# Altium PCB fpga.PcbDoc (part 2 of 6)
Units mm, origin at the board's own origin, x right, y up, seen from the top; angles counter-clockwise.
Board outline 111.63 x 111 mm, 2 copper layers (Top Layer, Bottom Layer); 5 components, 0 nets, 896 pads, 0 vias.
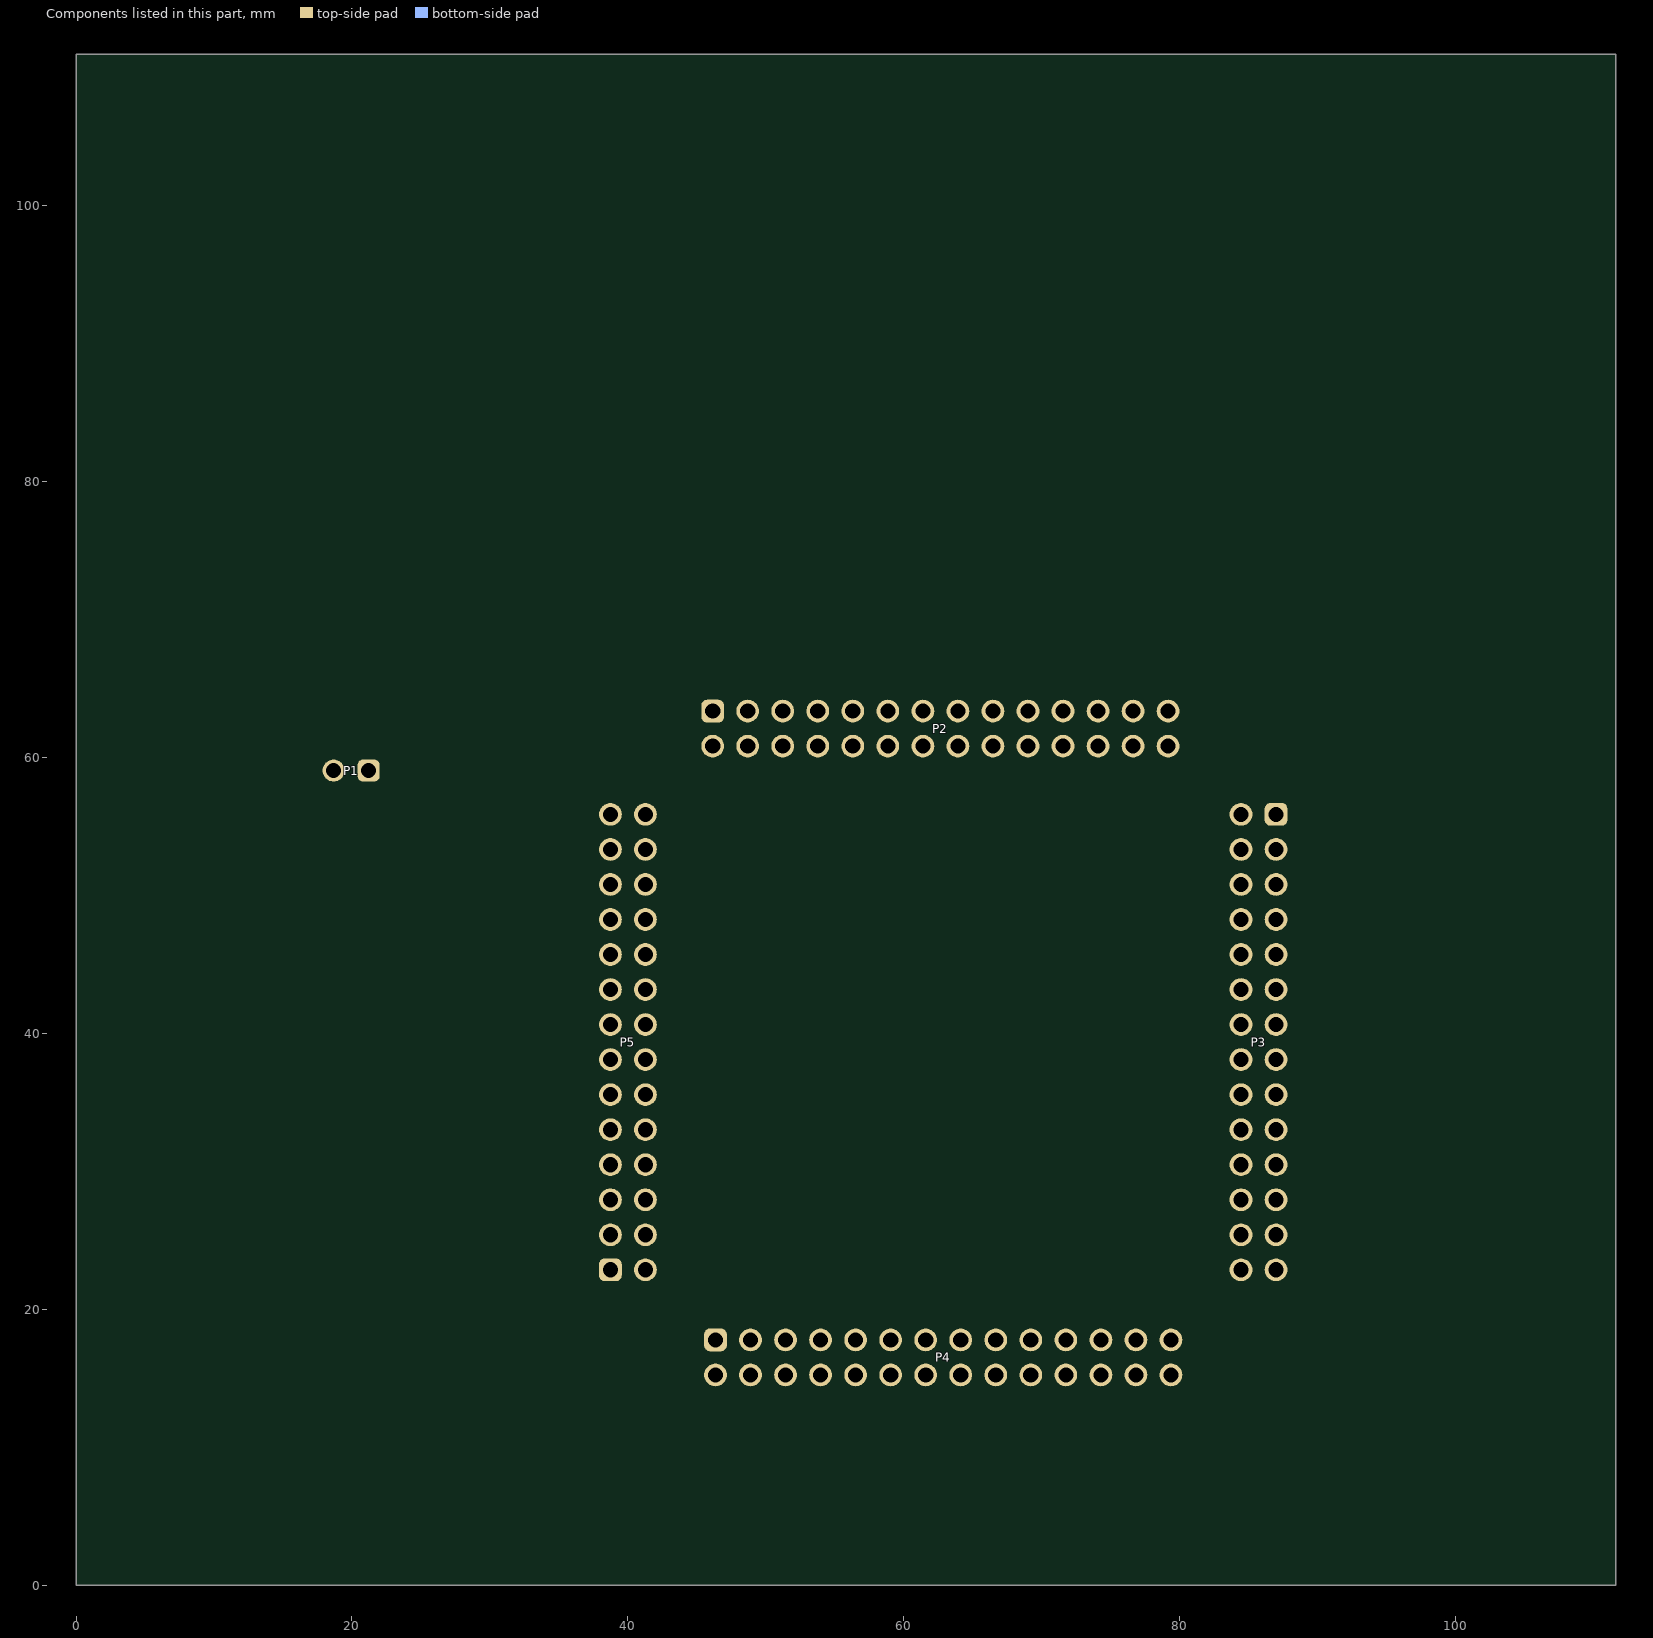
[diagram p2: the components of this part, seen from the top]

## Nets (pads, with @x,y where several pads share a name; then routed paths per layer and width w, separated by ;. In a path a pad name is that pad's centre, name@x,y a point inside that pad or via, vN(x,y) a via of type N, cw(c..) or ccw(c..) an arc to the next point about the centre after c; other vN are vias at no path point) (continued)
copper on no net: (continued)
  Top Layer w0.027: 2.847,21.27 2.872,21.245 2.872,21.07 2.997,21.07 3.022,21.045 ; 2.847,21.295 2.772,21.295 ; 2.847,21.345 2.772,21.345 ; 2.847,21.395 2.772,21.395 ; 2.847,21.445 2.772,21.445 ; 2.847,21.495 2.772,21.495 ; 2.847,21.545 2.772,21.545 ; 2.847,21.595 2.772,21.595 ; 2.847,21.645 2.772,21.645 ; 2.847,21.695 2.772,21.695 ; 2.847,21.745 2.772,21.745 ; 2.847,21.795 2.772,21.795 ; 2.847,21.845 2.772,21.845 ; 2.847,21.895 2.772,21.895 ; 2.847,21.945 2.772,21.945 ; 2.847,21.995 2.772,21.995 ; 2.847,22.045 2.772,22.045 ; 2.847,22.095 2.772,22.095 ; 2.847,22.145 2.772,22.145 ; 2.847,22.195 2.772,22.195 ; 2.847,22.245 2.772,22.245 ; 2.847,22.295 2.772,22.295 ; 2.847,22.345 2.772,22.345 ; 2.847,22.395 2.772,22.395 ; 2.847,22.445 2.772,22.445 ; 2.847,22.495 2.772,22.495 ; 2.847,22.545 2.772,22.545 ; 2.847,22.595 2.772,22.595 ; 2.847,22.645 2.772,22.645 ; 2.847,22.695 2.772,22.695 ; 2.847,22.745 2.772,22.745 ; 2.847,22.795 2.772,22.795 ; 2.847,22.845 2.772,22.845 ; 2.847,22.895 2.772,22.895 ; 2.847,22.945 2.772,22.945 ; 2.847,22.995 2.772,22.995 ; 2.847,23.045 2.772,23.045 ; 2.847,23.095 2.772,23.095 ; 2.847,23.145 2.772,23.145 ; 2.847,23.195 2.772,23.195 ; 2.847,23.245 2.772,23.245 ; 2.847,23.295 2.772,23.295 ; 2.847,23.345 2.772,23.345 ; 2.847,23.395 2.772,23.395 ; 2.847,23.445 2.772,23.445 ; 2.847,23.495 2.772,23.495 ; 2.847,23.545 2.772,23.545 ; 2.847,23.595 2.772,23.595 ; 2.847,23.645 2.772,23.645 ; 2.847,23.695 2.772,23.695 ; 2.847,23.745 2.772,23.745 ; 2.847,23.795 2.772,23.795 ; 2.847,23.845 2.772,23.845 ; 2.847,23.895 2.772,23.895 ; 2.847,23.945 2.772,23.945 ; 2.847,23.995 2.772,23.995 ; 2.847,24.045 2.772,24.045 ; 2.847,24.095 2.772,24.095 ; 2.847,24.145 2.772,24.145 ; 2.847,24.195 2.772,24.195 ; 2.847,24.245 2.772,24.245 ; 2.847,24.295 2.772,24.295 ; 2.847,24.345 2.772,24.345 ; 2.847,24.395 2.772,24.395 ; 2.847,24.445 2.772,24.445 ; 2.847,24.495 2.772,24.495 ; 2.847,24.545 2.772,24.545 ; 2.847,24.595 2.772,24.595 ; 2.847,24.645 2.772,24.645 ; 2.847,24.695 2.772,24.695 ; 2.847,24.745 2.772,24.745 ; 2.847,24.795 2.772,24.795 ; 2.847,24.845 2.772,24.845 ; 2.847,24.895 2.772,24.895 ; 2.847,24.945 2.772,24.945 ; 2.847,24.995 2.772,24.995 ; 2.847,25.045 2.772,25.045 ; 2.847,25.095 2.772,25.095 ; 2.847,25.145 2.772,25.145 ; 2.847,25.195 2.772,25.195 ; 2.847,25.245 2.772,25.245 ; 2.847,25.295 2.772,25.295 ; 2.847,25.345 2.772,25.345 ; 2.847,25.395 2.772,25.395 ; 2.847,25.445 2.772,25.445 ; 2.847,25.495 2.772,25.495 ; 2.847,25.545 2.772,25.545 ; 2.847,25.595 2.772,25.595 ; 2.847,25.645 2.772,25.645 ; 2.847,25.695 2.772,25.695 ; 2.847,25.745 2.772,25.745 ; 2.847,25.795 2.772,25.795 ; 2.847,25.845 2.772,25.845 ; 2.847,25.895 2.772,25.895 ; 2.847,25.945 2.772,25.945 ; 2.847,25.995 2.772,25.995 ; 2.847,26.045 2.772,26.045 ; 2.847,26.095 2.772,26.095 ; 2.847,26.145 2.772,26.145 ; 2.847,26.195 2.772,26.195 ; 2.847,26.245 2.772,26.245 ; 2.847,26.295 2.772,26.295 ; 2.847,26.345 2.772,26.345 ; 2.847,26.395 2.772,26.395 ; 2.847,26.445 2.772,26.445 ; 2.847,26.495 2.772,26.495 ; 2.847,26.545 2.772,26.545 ; 2.847,26.595 2.772,26.595 ; 2.847,26.645 2.772,26.645 ; 2.847,26.695 2.772,26.695 ; 2.847,26.745 2.772,26.745 ; 2.847,26.795 2.772,26.795 ; 2.847,26.845 2.772,26.845 ; 2.847,26.895 2.772,26.895 ; 2.847,26.945 2.772,26.945 ; 2.847,26.995 2.772,26.995 ; 2.847,27.045 2.772,27.045 ; 2.847,27.095 2.772,27.095 ; 2.847,27.145 2.772,27.145 ; 2.847,27.195 2.772,27.195 ; 2.847,27.245 2.772,27.245 ; 2.847,27.295 2.772,27.295 ; 2.847,27.345 2.772,27.345 ; 2.847,27.395 2.772,27.395 ; 2.847,27.445 2.772,27.445 ; 2.847,27.495 2.772,27.495 ; 2.847,27.545 2.772,27.545 ; 2.847,27.595 2.772,27.595 ; 2.847,27.645 2.772,27.645 ; 2.847,27.695 2.772,27.695 ; 2.847,27.745 2.772,27.745 ; 2.847,27.795 2.772,27.795 ; 2.847,27.845 2.772,27.845 ; 2.847,27.895 2.772,27.895 ; 2.847,27.945 2.772,27.945 ; 2.847,27.995 2.772,27.995 ; 2.847,28.045 2.772,28.045 ; 2.847,28.095 2.772,28.095 ; 2.847,28.145 2.772,28.145 ; 2.847,28.195 2.772,28.195 ; 2.847,28.245 2.772,28.245 ; 2.847,28.295 2.772,28.295 ; 2.847,28.345 2.772,28.345 ; 2.847,28.395 2.772,28.395 ; 2.847,28.445 2.772,28.445 ; 2.847,28.495 2.772,28.495 ; 2.847,28.545 2.772,28.545 ; 2.847,28.595 2.772,28.595 ; 2.847,28.645 2.772,28.645 ; 2.847,28.695 2.772,28.695 ; 2.847,28.745 2.772,28.745 ; 2.847,28.795 2.772,28.795 ; 2.847,28.845 2.772,28.845 ; 2.847,28.895 2.772,28.895 ; 2.847,28.945 2.772,28.945 ; 2.847,28.995 2.772,28.995 ; 2.847,29.045 2.772,29.045 ; 2.847,29.095 2.772,29.095 ; 2.847,29.145 2.772,29.145 ; 2.847,29.195 2.772,29.195 ; 2.847,29.245 2.772,29.245 ; 2.847,29.295 2.772,29.295 ; 2.847,29.345 2.772,29.345 ; 2.847,29.395 2.772,29.395 ; 2.847,29.445 2.772,29.445 ; 2.847,29.495 2.772,29.495 ; 2.847,29.545 2.772,29.545 ; 2.847,29.595 2.772,29.595 ; 2.847,29.645 2.772,29.645 ; 2.847,29.695 2.772,29.695 ; 2.847,29.745 2.772,29.745 ; 2.847,29.795 2.772,29.795 ; 2.847,29.845 2.772,29.845 ; 2.847,29.895 2.772,29.895 ; 2.847,29.945 2.772,29.945 ; 2.847,29.995 2.772,29.995 ; 2.847,30.045 2.772,30.045 ; 2.847,30.095 2.772,30.095 ; 2.847,30.145 2.772,30.145 ; 2.847,30.195 2.772,30.195 ; 2.847,30.245 2.772,30.245 ; 2.847,30.295 2.772,30.295 ; 2.847,30.345 2.772,30.345 ; 2.847,30.395 2.772,30.395 ; 2.847,30.445 2.772,30.445 ; 2.847,30.495 2.772,30.495 ; 2.847,30.545 2.772,30.545 ; 2.847,30.595 2.772,30.595 ; 2.847,30.645 2.772,30.645 ; 2.847,30.695 2.772,30.695 ; 2.847,30.745 2.772,30.745 ; 2.847,30.795 2.772,30.795 ; 2.847,30.845 2.772,30.845 ; 2.847,30.895 2.772,30.895 ; 2.847,30.945 2.772,30.945 ; 2.847,30.995 2.772,30.995 ; 2.847,31.045 2.772,31.045 ; 2.847,31.095 2.772,31.095 ; 2.847,31.145 2.772,31.145 ; 2.847,31.195 2.772,31.195 ; 2.847,31.245 2.772,31.245 ; 2.847,31.295 2.772,31.295 ; 2.847,31.345 2.772,31.345 ; 2.847,31.395 2.772,31.395 ; 2.847,31.445 2.772,31.445 ; 2.847,31.495 2.772,31.495 ; 2.847,31.545 2.772,31.545 ; 2.847,31.595 2.772,31.595 ; 2.847,31.645 2.772,31.645 ; 2.847,31.695 2.772,31.695 ; 2.847,31.745 2.772,31.745 ; 2.847,31.795 2.772,31.795 ; 2.847,31.845 2.772,31.845 ; 2.847,31.895 2.772,31.895 ; 2.847,31.945 2.772,31.945 ; 2.847,31.995 2.772,31.995 ; 2.847,32.045 2.772,32.045 ; 2.847,32.095 2.772,32.095 ; 2.847,32.145 2.772,32.145 ; 2.847,32.195 2.772,32.195 ; 2.847,32.245 2.772,32.245 ; 2.847,32.295 2.772,32.295 ; 2.847,32.345 2.772,32.345 ; 2.847,32.395 2.772,32.395 ; 2.847,32.445 2.772,32.445 ; 2.847,32.495 2.772,32.495 ; 2.847,32.545 2.772,32.545 ; 2.847,32.595 2.772,32.595 ; 2.847,32.645 2.772,32.645 ; 2.847,32.695 2.772,32.695 ; 2.847,32.745 2.772,32.745 ; 2.847,32.795 2.772,32.795 ; 2.847,32.845 2.772,32.845 ; 2.847,32.895 2.772,32.895 ; 2.847,32.945 2.772,32.945 ; 2.847,32.995 2.772,32.995 ; 2.847,33.045 2.772,33.045 ; 2.847,33.095 2.772,33.095 ; 2.847,33.145 2.772,33.145 ; 2.847,33.195 2.772,33.195 ; 2.847,33.245 2.772,33.245 ; 2.847,33.295 2.772,33.295 ; 2.847,33.345 2.772,33.345 ; 2.847,33.395 2.772,33.395 ; 2.847,33.445 2.772,33.445 ; 2.847,33.495 2.772,33.495 ; 2.847,33.545 2.772,33.545 ; 2.847,33.595 2.772,33.595 ; 2.847,33.645 2.772,33.645 ; 2.847,33.695 2.772,33.695 ; 2.847,33.745 2.772,33.745 ; 2.847,33.795 2.772,33.795 ; 2.847,33.845 2.772,33.845 ; 2.847,33.895 2.772,33.895 ; 2.847,33.945 2.772,33.945 ; 2.847,33.995 2.772,33.995 ; 2.847,34.045 2.772,34.045 ; 2.847,34.095 2.772,34.095 ; 2.847,34.145 2.772,34.145 ; 2.847,34.195 2.772,34.195 ; 2.847,34.245 2.772,34.245 ; 2.847,34.295 2.772,34.295 ; 2.847,34.345 2.772,34.345 ; 2.847,34.395 2.772,34.395 ; 2.847,34.445 2.772,34.445 ; 2.847,34.495 2.772,34.495 ; 2.847,34.545 2.772,34.545 ; 2.847,34.595 2.772,34.595 ; 2.847,34.645 2.772,34.645 ; 2.847,34.695 2.772,34.695 ; 2.847,34.745 2.772,34.745 ; 2.847,34.795 2.772,34.795 ; 2.847,34.845 2.772,34.845 ; 2.847,34.895 2.772,34.895 ; 2.847,34.945 2.772,34.945 ; 2.847,34.995 2.772,34.995 ; 2.847,35.045 2.772,35.045 ; 2.847,35.095 2.772,35.095 ; 2.847,35.145 2.772,35.145 ; 2.847,35.195 2.772,35.195 ; 2.847,35.245 2.772,35.245 ; 2.847,35.295 2.772,35.295 ; 2.847,35.345 2.772,35.345 ; 2.847,35.395 2.772,35.395 ; 2.847,35.445 2.772,35.445 ; 2.847,35.495 2.772,35.495 ; 2.847,35.545 2.772,35.545 ; 2.847,35.595 2.772,35.595 ; 2.847,35.645 2.772,35.645 ; 2.847,35.695 2.772,35.695 ; 2.847,35.745 2.772,35.745 ; 2.847,35.795 2.772,35.795 ; 2.847,35.845 2.772,35.845 ; 2.847,35.895 2.772,35.895 ; 2.847,35.945 2.772,35.945 ; 2.847,35.995 2.772,35.995 ; 2.847,36.045 2.772,36.045 ; 2.847,36.095 2.772,36.095 ; 2.847,36.145 2.772,36.145 ; 2.847,36.195 2.772,36.195 ; 2.847,36.245 2.772,36.245 ; 2.847,36.295 2.772,36.295 ; 2.847,36.345 2.772,36.345 ; 2.847,36.395 2.772,36.395 ; 2.847,36.445 2.772,36.445 ; 2.847,36.495 2.772,36.495 ; 2.847,36.545 2.772,36.545 ; 2.847,36.595 2.772,36.595 ; 2.847,36.645 2.772,36.645 ; 2.847,36.695 2.772,36.695 ; 2.847,36.745 2.772,36.745 ; 2.847,36.795 2.772,36.795 ; 2.847,36.845 2.772,36.845 ; 2.847,36.895 2.772,36.895 ; 2.847,36.945 2.772,36.945 ; 2.847,36.995 2.772,36.995 ; 2.847,37.045 2.772,37.045 ; 2.847,37.095 2.772,37.095 ; 2.847,37.145 2.772,37.145 ; 2.847,37.195 2.772,37.195 ; 2.847,37.245 2.772,37.245 ; 2.847,37.295 2.772,37.295 ; 2.847,37.345 2.772,37.345 ; 2.847,37.395 2.772,37.395 ; 2.847,37.445 2.772,37.445 ; 2.847,37.495 2.772,37.495 ; 2.847,37.545 2.772,37.545 ; 2.847,37.595 2.772,37.595 ; 2.847,37.645 2.772,37.645 ; 2.847,37.695 2.772,37.695 ; 2.847,37.745 2.772,37.745 ; 2.847,37.795 2.772,37.795 ; 2.847,37.845 2.772,37.845 ; 2.847,37.895 2.772,37.895 ; 2.847,37.945 2.772,37.945 ; 2.847,37.995 2.772,37.995 ; 2.847,38.045 2.772,38.045 ; 2.847,38.095 2.772,38.095 ; 2.847,38.145 2.772,38.145 ; 2.847,38.195 2.772,38.195 ; 2.847,38.245 2.772,38.245 ; 2.847,38.295 2.772,38.295 ; 2.847,38.345 2.772,38.345 ; 2.847,38.395 2.772,38.395 ; 2.847,38.445 2.772,38.445 ; 2.847,38.495 2.772,38.495 ; 2.847,38.545 2.772,38.545 ; 2.847,38.595 2.772,38.595 ; 2.847,38.645 2.772,38.645 ; 2.847,38.695 2.772,38.695 ; 2.847,38.745 2.772,38.745 ; 2.847,38.795 2.772,38.795 ; 2.847,38.845 2.772,38.845 ; 2.847,38.895 2.772,38.895 ; 2.847,38.945 2.772,38.945 ; 2.847,38.995 2.772,38.995 ; 2.847,39.045 2.772,39.045 ; 2.847,39.095 2.772,39.095 ; 2.847,39.145 2.772,39.145 ; 2.847,39.195 2.772,39.195 ; 2.847,39.245 2.772,39.245 ; 2.847,39.295 2.772,39.295 ; 2.847,39.345 2.772,39.345 ; 2.847,39.395 2.772,39.395 ; 2.847,39.445 2.772,39.445 ; 2.847,39.495 2.772,39.495 ; 2.847,39.545 2.772,39.545 ; 2.847,39.595 2.772,39.595 ; 2.847,39.645 2.772,39.645 ; 2.847,39.695 2.772,39.695 ; 2.847,39.745 2.772,39.745 ; 2.847,39.795 2.772,39.795 ; 2.847,39.845 2.772,39.845 ; 2.847,39.895 2.772,39.895 ; 2.847,39.945 2.772,39.945 ; 2.847,39.995 2.772,39.995 ; 2.847,40.045 2.772,40.045 ; 2.847,40.095 2.772,40.095 ; 2.847,40.145 2.772,40.145 ; 2.847,40.195 2.772,40.195 ; 2.847,40.245 2.772,40.245 ; 2.847,40.295 2.772,40.295 ; 2.847,40.345 2.772,40.345 ; 2.847,40.395 2.772,40.395 ; 2.847,40.445 2.772,40.445 ; 2.847,40.495 2.772,40.495 ; 2.847,40.545 2.772,40.545 ; 2.847,40.595 2.772,40.595 ; 2.847,40.645 2.772,40.645 ; 2.847,40.695 2.772,40.695 ; 2.847,40.745 2.772,40.745 ; 2.847,40.795 2.772,40.795 ; 2.847,40.845 2.772,40.845 ; 2.847,40.895 2.772,40.895 ; 2.847,40.945 2.772,40.945 ; 2.847,40.995 2.772,40.995 ; 2.847,41.045 2.772,41.045 ; 2.847,41.095 2.772,41.095 ; 2.847,41.145 2.772,41.145 ; 2.847,41.195 2.772,41.195 ; 2.847,41.245 2.772,41.245 ; 2.847,41.295 2.772,41.295 ; 2.847,41.345 2.772,41.345 ; 2.847,41.395 2.772,41.395 ; 2.847,41.445 2.772,41.445 ; 2.847,41.495 2.772,41.495 ; 2.847,41.545 2.772,41.545 ; 2.847,41.595 2.772,41.595 ; 2.847,41.645 2.772,41.645 ; 2.847,41.695 2.772,41.695 ; 2.847,41.745 2.772,41.745 ; 2.847,41.795 2.772,41.795 ; 2.847,41.845 2.772,41.845 ; 2.847,41.895 2.772,41.895 ; 2.847,41.945 2.772,41.945 ; 2.847,41.995 2.772,41.995 ; 2.847,42.045 2.772,42.045 ; 2.847,42.095 2.772,42.095 ; 2.847,42.145 2.772,42.145 ; 2.847,42.195 2.772,42.195 ; 2.847,42.245 2.772,42.245 ; 2.847,42.295 2.772,42.295 ; 2.847,42.345 2.772,42.345 ; 2.847,42.395 2.772,42.395 ; 2.847,42.445 2.772,42.445 ; 2.847,42.495 2.772,42.495 ; 2.847,42.545 2.772,42.545 ; 2.847,42.595 2.772,42.595 ; 2.847,42.645 2.772,42.645 ; 2.847,42.695 2.772,42.695 ; 2.847,42.745 2.772,42.745 ; 2.847,42.795 2.772,42.795 ; 2.847,42.845 2.772,42.845 ; 2.847,42.895 2.772,42.895 ; 2.847,42.945 2.772,42.945 ; 2.847,42.995 2.772,42.995 ; 2.847,43.045 2.772,43.045 ; 2.847,43.095 2.772,43.095 ; 2.847,43.145 2.772,43.145 ; 2.847,43.195 2.772,43.195 ; 2.847,43.245 2.772,43.245 ; 2.847,43.295 2.772,43.295 ; 2.847,43.345 2.772,43.345 ; 2.847,43.395 2.772,43.395 ; 2.847,43.445 2.772,43.445 ; 2.847,43.495 2.772,43.495 ; 2.847,43.545 2.772,43.545 ; 2.847,43.595 2.772,43.595 ; 2.847,43.645 2.772,43.645 ; 2.847,43.695 2.772,43.695 ; 2.847,43.745 2.772,43.745 ; 2.847,43.795 2.772,43.795 ; 2.847,43.845 2.772,43.845 ; 2.847,43.895 2.772,43.895 ; 2.847,43.945 2.772,43.945 ; 2.847,43.995 2.772,43.995 ; 2.847,44.045 2.772,44.045 ; 2.847,44.095 2.772,44.095 ; 2.847,44.145 2.772,44.145 ; 2.847,44.195 2.772,44.195 ; 2.847,44.245 2.772,44.245 ; 2.847,44.295 2.772,44.295 ; 2.847,44.345 2.772,44.345 ; 2.847,44.395 2.772,44.395 ; 2.847,44.445 2.772,44.445 ; 2.847,44.495 2.772,44.495 ; 2.847,44.545 2.772,44.545 ; 2.847,44.595 2.772,44.595 ; 2.847,44.645 2.772,44.645 ; 2.847,44.695 2.772,44.695 ; 2.847,44.745 2.772,44.745 ; 2.847,44.795 2.772,44.795 ; 2.847,44.845 2.772,44.845 ; 2.847,44.895 2.772,44.895 ; 2.847,44.945 2.772,44.945 ; 2.847,44.995 2.772,44.995 ; 2.847,45.045 2.772,45.045 ; 2.847,45.095 2.772,45.095 ; 2.847,45.12 2.872,45.145 2.872,45.345 2.997,45.345 ; 2.897,21.02 2.897,21.245 ; 2.897,45.145 2.897,45.37 3.047,45.37 ; 2.947,21.12 2.972,21.095 2.972,20.97 14.447,20.97 ; 2.947,45.27 2.947,45.42 14.447,45.42 14.472,45.395 14.472,45.27 14.597,45.27 14.597,21.12 ; 2.997,45.32 2.997,45.47 ; 3.022,20.945 3.047,20.92 ; 3.022,45.37 2.997,45.345 ; 3.022,45.47 3.047,45.495 ; 3.072,21.02 3.047,21.045 ; 3.072,45.395 3.047,45.37 ; 3.097,20.92 3.097,21.02 ; 3.097,45.495 3.097,45.395 ; 3.122,20.92 3.147,20.895 ; 3.122,20.995 3.097,21.02 ; 3.122,45.42 3.097,45.395 ; 3.122,45.495 3.147,45.52 ; 3.147,20.995 3.147,20.895 ; 3.147,45.42 3.147,45.52 ; 3.797,30.095 3.822,30.12 ; 3.797,30.195 5.472,30.195 ; 3.797,30.22 5.322,30.22 ; 3.797,30.245 5.222,30.245 ; 3.797,30.27 5.097,30.27 ; 3.797,30.295 4.922,30.295 ; 3.797,30.32 4.772,30.32 ; 3.797,30.345 4.622,30.345 ; 3.797,30.52 3.772,30.495 ; 3.822,31.32 3.797,31.295 ; 3.822,31.345 3.797,31.37 ; 3.822,31.395 3.797,31.37 ; 3.822,31.445 3.797,31.47 ; 3.822,31.495 3.797,31.47 ; 3.822,31.545 3.797,31.57 ; 3.822,31.595 3.797,31.57 ; 3.822,31.645 3.797,31.67 ; 3.822,31.695 3.797,31.67 ; 3.822,31.72 3.797,31.745 ; 3.822,31.77 3.797,31.745 ; 3.822,33.195 3.797,33.17 ; 3.847,30.07 6.222,30.07 ; 3.872,29.995 7.022,29.995 ; 3.872,30.045 3.872,33.295 4.197,33.295 ; 3.897,29.995 3.922,30.02 ; 3.897,33.745 3.922,33.72 ; 3.997,23.02 4.047,23.07 ; 3.997,23.07 4.047,23.02 ; 3.997,32.045 4.022,32.02 ; 3.997,33.82 4.022,33.795 ; 4.022,23.045 6.272,23.045 ; 4.022,28.345 5.422,28.345 ; 4.022,33.645 4.022,33.795 ; 4.022,33.845 4.047,33.82 ; 4.047,22.945 4.072,22.97 ; 4.047,23.095 4.047,22.995 4.097,22.945 6.722,22.945 ; 4.047,32.12 4.072,32.145 4.072,33.37 ; 4.047,33.645 4.047,33.82 ; 4.047,33.87 4.072,33.845 ; 4.072,33.645 4.072,33.845 ; 4.097,32.17 4.122,32.195 4.122,33.37 4.097,33.345 ; 4.147,23.22 4.172,23.195 ; 4.147,33.92 4.172,33.945 5.022,33.945 ; 4.197,30.87 3.797,30.87 ; 4.197,30.92 3.797,30.92 ; 4.197,30.945 3.797,30.945 ; 4.197,30.995 3.797,30.995 ; 4.197,31.045 3.797,31.045 ; 4.197,31.095 3.797,31.095 ; 4.197,31.145 3.797,31.145 ; 4.197,31.195 3.797,31.195 ; 4.197,31.245 3.797,31.245 ; 4.197,31.295 3.797,31.295 ; 4.197,31.37 3.797,31.37 ; 4.197,31.47 3.797,31.47 ; 4.197,31.57 3.797,31.57 ; 4.197,31.67 3.797,31.67 ; 4.197,31.745 3.797,31.745 ; 4.197,32.27 3.797,32.27 ; 4.197,32.32 3.797,32.32 ; 4.197,32.37 3.797,32.37 ; 4.197,32.42 3.797,32.42 ; 4.197,32.47 3.797,32.47 ; 4.197,32.52 3.797,32.52 ; 4.197,32.57 3.797,32.57 ; 4.197,32.62 3.797,32.62 ; 4.197,32.67 3.797,32.67 ; 4.197,32.72 3.797,32.72 ; 4.197,32.77 3.797,32.77 ; 4.197,32.82 3.797,32.82 ; 4.197,32.87 3.797,32.87 ; 4.197,32.92 3.797,32.92 ; 4.197,32.97 3.797,32.97 ; 4.197,33.02 3.797,33.02 ; 4.197,33.07 3.797,33.07 ; 4.197,33.12 3.797,33.12 ; 4.197,33.17 3.797,33.17 ; 4.197,33.27 3.822,33.27 3.822,30.12 ; 4.222,28.12 4.247,28.095 6.597,28.095 6.597,27.72 ; 4.247,23.27 4.247,22.87 ; 4.247,28.52 4.247,28.07 4.272,28.095 4.297,28.07 ; 4.272,22.87 4.297,22.845 ; 4.272,23.27 4.322,23.32 4.772,23.32 ; 4.272,23.32 4.297,23.295 ; 4.272,29.895 4.272,30.42 ; 4.272,33.595 4.272,34.045 4.472,34.045 ; 4.272,36.82 5.097,36.82 ; 4.272,36.845 4.972,36.845 ; 4.272,36.87 4.772,36.87 ; 4.297,28.52 4.297,28.07 ; 4.297,30.395 4.272,30.42 ; 4.297,34.045 4.322,34.07 ; 4.297,35.87 4.297,35.445 ; 4.297,36.595 6.572,36.595 ; 4.297,36.62 6.497,36.62 ; 4.297,36.645 6.322,36.645 ; 4.297,36.67 6.122,36.67 ; 4.297,36.695 5.947,36.695 ; 4.322,29.895 4.347,29.87 ; 4.322,33.595 4.322,34.07 ; 4.322,36.92 4.322,36.545 6.622,36.545 6.622,36.07 ; 4.347,22.82 4.347,23.32 ; 4.347,30.395 4.347,29.87 ; 4.347,33.595 4.372,33.57 ; 4.347,36.92 4.347,36.52 ; 4.397,34.045 4.372,34.07 ; 4.397,35.445 4.422,35.42 ; 4.397,36.52 4.422,36.495 ; 4.422,23.345 4.447,23.37 ; 4.422,30.37 4.397,30.395 ; 4.422,33.57 4.447,33.545 ; 4.422,35.87 4.422,35.42 ; 4.422,36.92 4.422,36.495 ; 4.447,28.495 4.447,28.045 ; 4.447,34.045 4.447,33.545 ; 4.447,35.42 4.447,35.87 ; 4.472,35.845 4.447,35.87 ; 4.472,36.495 4.472,36.92 ; 4.497,29.87 4.522,29.845 ; 4.497,36.895 4.472,36.92 ; 4.522,28.045 4.522,28.495 ; 4.522,30.37 4.522,29.845 ; 4.522,33.545 4.522,34.045 ; 4.522,35.42 4.547,35.395 ; 4.547,23.345 4.547,22.795 ; 4.547,28.045 4.572,28.02 ; 4.547,28.47 4.522,28.495 ; 4.547,29.845 4.547,30.37 ; 4.547,34.02 4.522,34.045 ; 4.547,35.845 4.547,35.395 ; 4.547,36.495 4.572,36.47 ; 4.572,28.47 4.572,28.02 ; 4.572,30.345 4.547,30.37 ; 4.572,36.895 4.572,36.47 ; 4.597,23.345 4.597,22.795 ; 4.597,33.545 4.622,33.52 ; 4.597,35.395 4.597,35.845 ; 4.597,36.47 4.597,36.895 ; 4.622,23.345 4.622,22.795 ; 4.622,29.845 4.622,30.345 ; 4.622,34.02 4.622,33.52 ; 4.622,35.395 4.647,35.37 ; 4.622,35.82 4.597,35.845 ; 4.647,29.845 4.672,29.82 ; 4.647,33.52 4.647,34.02 ; 4.647,35.82 4.647,35.37 ; 4.647,36.47 4.647,36.895 ; 4.672,33.995 4.647,34.02 ; 4.672,36.87 4.647,36.895 ; 4.697,23.32 4.697,22.77 ; 4.697,30.32 4.672,30.345 ; 4.697,36.47 4.722,36.445 ; 4.722,33.52 4.747,33.495 ; 4.722,36.87 4.722,36.445 ; 4.747,22.745 4.747,23.32 ; 4.747,28.445 4.747,27.995 ; 4.747,33.995 4.747,33.495 ; 4.747,35.37 4.747,35.82 ; 4.772,29.82 4.772,30.32 ; 4.772,35.795 4.747,35.82 ; 4.772,36.445 4.772,36.87 ; 4.797,28.445 4.797,27.995 ; 4.797,29.82 4.822,29.795 ; 4.797,33.495 4.797,33.995 ; 4.797,35.37 4.822,35.345 ; 4.822,33.97 4.797,33.995 ; 4.822,35.795 4.822,35.345 ; 4.822,36.445 4.822,36.87 ; 4.847,23.295 4.847,22.745 ; 4.847,30.295 4.822,30.32 ; 4.847,33.495 4.872,33.47 ; 4.847,36.445 4.872,36.42 ; 4.847,36.845 4.822,36.87 ; 4.872,33.97 4.872,33.47 ; 4.872,36.845 4.872,36.42 ; 4.897,28.42 4.897,27.97 ; 4.922,33.47 4.922,33.97 ; 4.947,28.42 4.947,27.97 ; 4.947,33.945 4.922,33.97 ; 4.972,27.97 4.972,28.42 ; 4.972,33.47 4.997,33.445 ; 4.972,35.77 4.972,35.32 ; 4.997,23.27 4.997,22.72 ; 4.997,28.395 4.972,28.42 ; 4.997,33.945 4.997,33.445 ; 5.022,27.97 5.047,27.945 ; 5.022,33.445 5.022,33.945 ; 5.022,35.32 5.022,35.77 ; 5.047,28.395 5.047,27.945 ; 5.047,36.82 5.047,36.395 ; 5.072,29.77 5.097,29.745 ; 5.072,33.445 5.072,33.945 ; 5.072,35.32 5.072,35.77 ; 5.072,36.395 5.097,36.37 ; 5.097,28.395 5.097,27.945 ; 5.097,33.445 5.122,33.42 ; 5.097,33.92 5.072,33.945 ; 5.097,35.32 5.122,35.295 ; 5.097,35.745 5.072,35.77 ; 5.122,27.945 5.122,28.395 ; 5.122,30.245 5.097,30.27 ; 5.122,33.92 5.122,33.42 ; 5.122,35.745 5.122,35.295 ; 5.147,23.245 5.147,22.695 ; 5.147,28.37 5.122,28.395 ; 5.147,30.245 5.147,29.745 ; 5.147,33.42 5.147,33.92 ; 5.172,27.945 5.197,27.92 ; 5.172,36.795 5.147,36.82 ; 5.197,28.37 5.197,27.92 ; 5.197,30.245 5.197,29.745 ; 5.197,33.42 5.197,33.92 ; 5.197,35.295 5.197,35.745 ; 5.197,36.795 5.197,36.37 ; 5.222,33.42 5.247,33.395 ; 5.222,33.895 5.197,33.92 ; 5.222,35.295 5.247,35.27 ; 5.222,35.72 5.197,35.745 ; 5.222,36.37 5.247,36.345 ; 5.247,28.37 5.247,27.92 ; 5.247,33.895 5.247,33.395 ; 5.247,35.72 5.247,35.27 ; 5.247,36.795 5.247,36.345 ; 5.297,23.22 5.297,22.67 ; 5.297,30.22 5.297,29.72 ; 5.297,33.395 5.297,33.895 ; 5.297,35.72 5.297,35.27 ; 5.347,28.345 5.347,27.895 ; 5.372,36.345 5.397,36.32 ; 5.397,28.345 5.397,27.895 ; 5.397,36.77 5.397,36.32 ; 5.447,23.195 5.447,22.645 ; 5.447,30.195 5.447,29.695 ; 5.447,33.37 5.447,33.87 ; 5.447,35.695 5.447,35.245 ; 5.497,28.32 5.497,27.87 ; 5.497,36.32 5.497,36.77 ; 5.522,36.32 5.547,36.295 ; 5.522,36.745 5.497,36.77 ; 5.547,36.745 5.547,36.295 ; 5.572,33.345 5.572,33.845 ; 5.572,35.67 5.547,35.695 ; 5.597,23.17 5.597,22.62 ; 5.597,30.17 5.597,29.67 ; 5.597,35.67 5.597,35.22 ; 5.597,36.745 5.597,36.295 ; 5.647,28.295 5.647,27.845 ; 5.647,35.67 5.647,35.195 5.672,35.22 5.697,35.195 ; 5.672,30.145 5.647,30.17 ; 5.672,33.32 5.672,33.82 ; 5.697,23.145 5.697,22.595 ; 5.697,30.145 5.697,29.645 ; 5.722,33.32 5.722,33.82 ; 5.722,35.645 5.697,35.67 ; 5.747,33.32 5.772,33.295 ; 5.747,35.645 5.747,35.195 ; 5.772,35.195 5.797,35.17 ; 5.797,28.27 5.797,27.82 ; 5.797,30.12 5.772,30.145 ; 5.797,33.795 5.772,33.82 ; 5.797,35.645 5.797,35.17 ; 5.797,36.27 5.822,36.245 ; 5.822,30.12 5.822,29.645 ; 5.822,33.295 5.822,33.795 ; 5.847,23.12 5.847,22.57 ; 5.847,30.12 5.847,29.62 ; 5.847,36.695 5.822,36.72 ; 5.872,27.82 5.872,28.27 ; 5.872,35.17 5.897,35.145 ; 5.872,35.62 5.847,35.645 ; 5.897,27.82 5.922,27.795 ; 5.897,28.245 5.872,28.27 ; 5.897,35.62 5.897,35.145 ; 5.922,28.245 5.922,27.795 ; 5.922,36.245 5.947,36.22 ; 5.947,30.095 5.922,30.12 ; 5.947,35.62 5.947,35.145 ; 5.972,30.095 5.972,29.62 ; 5.972,35.145 5.972,35.62 ; 5.997,23.095 5.997,22.545 ; 5.997,30.095 5.997,29.595 ; 5.997,36.22 5.997,36.695 ; 6.022,27.795 6.022,28.245 ; 6.022,36.22 6.047,36.195 ; 6.022,36.67 5.997,36.695 ; 6.047,27.795 6.072,27.77 ; 6.047,28.22 6.022,28.245 ; 6.047,30.095 6.047,29.595 ; 6.047,36.67 6.047,36.195 ; 6.072,28.22 6.072,27.77 ; 6.072,33.245 6.072,33.77 ; 6.097,30.07 6.072,30.095 ; 6.097,33.745 6.072,33.77 ; 6.097,35.595 6.097,35.12 ; 6.097,36.67 6.097,36.195 ; 6.122,30.07 6.122,29.595 ; 6.122,33.245 6.122,33.745 ; 6.122,35.12 6.122,35.595 ; 6.122,36.195 6.122,36.67 ; 6.147,30.07 6.147,29.57 ; 6.147,33.245 6.172,33.22 ; 6.172,36.195 6.172,36.67 ; 6.197,30.07 6.197,29.57 ; 6.197,36.195 6.222,36.17 ; 6.197,36.645 6.172,36.67 ; 6.222,33.22 6.222,33.745 ; 6.222,36.645 6.222,36.17 ; 6.247,23.045 6.247,22.495 ; 6.247,28.195 6.247,27.745 ; 6.247,33.72 6.222,33.745 ; 6.247,35.57 6.247,35.095 ; 6.297,30.045 6.297,29.545 ; 6.322,29.545 6.322,30.045 ; 6.322,33.195 6.322,33.72 ; 6.322,35.545 6.297,35.57 ; 6.347,33.695 6.322,33.72 ; 6.347,35.545 6.347,35.07 6.372,35.095 ; 6.372,33.195 6.397,33.17 ; 6.397,28.17 6.397,27.72 ; 6.397,33.695 6.397,33.17 ; 6.397,36.62 6.397,36.145 ; 6.447,30.02 6.447,29.52 ; 6.447,36.62 6.447,36.145 ; 6.472,27.72 6.472,28.17 ; 6.472,33.17 6.472,33.695 ; 6.497,28.145 6.472,28.17 ; 6.497,30.02 6.497,29.52 ; 6.497,35.52 6.497,35.07 ; 6.522,27.72 6.547,27.695 ; 6.522,33.17 6.522,33.695 6.547,33.67 6.622,33.745 6.597,33.77 7.072,33.77 ; 6.522,35.52 6.522,35.045 ; 6.522,36.595 6.497,36.62 ; 6.547,22.995 6.547,22.445 ; 6.547,30.02 6.547,29.52 ; 6.547,33.72 6.572,33.695 ; 6.547,36.595 6.547,36.12 ; 6.572,33.745 6.597,33.72 ; 6.572,35.045 6.597,35.02 9.322,35.02 ; 6.572,36.12 6.572,36.595 ; 6.597,30.045 6.572,30.02 6.572,29.545 6.297,29.545 ; 6.597,30.07 7.047,30.07 ; 6.597,30.12 7.047,30.12 ; 6.597,34.995 9.372,34.995 ; 6.622,22.445 6.622,22.995 ; 6.622,30.695 6.597,30.67 ; 6.622,30.72 6.597,30.745 ; 6.622,30.77 6.597,30.745 ; 6.622,31.92 7.072,31.92 ; 6.622,31.945 7.072,31.945 ; 6.622,33.195 6.622,33.845 ; 6.622,33.795 6.497,33.67 6.472,33.695 ; 6.622,34.895 7.072,34.895 ; 6.622,35.545 6.597,35.52 6.597,34.97 ; 6.647,22.97 6.622,22.995 ; 6.647,34.02 6.622,33.995 ; 6.647,34.07 6.622,34.095 ; 6.647,34.12 6.622,34.095 ; 6.647,34.145 6.622,34.17 ; 6.647,34.195 6.622,34.17 ; 6.647,34.295 7.072,34.295 ; 6.647,34.345 7.072,34.345 ; 6.647,34.445 7.097,34.445 ; 6.647,34.52 7.097,34.52 ; 6.647,34.57 6.622,34.595 ; 6.647,34.62 6.622,34.595 ; 6.647,34.745 6.622,34.77 ; 6.647,34.795 6.622,34.77 ; 6.647,35.695 6.622,35.67 ; 6.647,35.745 6.622,35.77 ; 6.672,22.445 6.672,22.97 ; 6.697,22.945 6.672,22.97 ; 6.797,27.82 6.797,27.92 5.247,27.92 ; 6.822,27.82 6.897,27.745 ; 6.872,31.495 6.797,31.495 6.797,29.72 5.347,29.72 ; 6.872,31.595 6.847,31.62 ; 6.922,22.67 6.897,22.695 5.222,22.695 ; 7.022,31.295 7.072,31.245 ; 7.047,30.195 6.597,30.195 ; 7.047,30.245 6.597,30.245 ; 7.047,30.295 6.597,30.295 ; 7.047,30.32 6.597,30.32 ; 7.047,30.37 6.597,30.37 ; 7.047,30.42 6.597,30.42 ; 7.047,30.47 6.597,30.47 ; 7.047,30.52 6.597,30.52 ; 7.047,30.57 6.597,30.57 ; 7.047,30.62 6.597,30.62 ; 7.047,30.67 6.597,30.67 ; 7.047,30.745 6.597,30.745 ; 7.047,30.945 7.072,30.97 ; 7.047,30.995 7.072,30.97 ; 7.072,32.12 6.622,32.12 ; 7.072,32.17 6.622,32.17 ; 7.072,32.22 6.622,32.22 ; 7.072,32.27 6.622,32.27 ; 7.072,32.295 7.122,32.345 7.122,32.845 ; 7.072,32.82 7.072,32.07 ; 7.072,33.67 3.947,33.67 ; 7.072,33.695 6.572,33.695 ; 7.072,33.72 6.597,33.72 ; 7.072,33.845 6.622,33.845 ; 7.072,33.895 6.622,33.895 ; 7.072,33.945 6.622,33.945 ; 7.072,33.995 6.622,33.995 ; 7.072,34.095 6.622,34.095 ; 7.072,34.17 6.622,34.17 ; 7.072,34.245 6.647,34.245 ; 7.072,34.395 6.647,34.395 ; 7.072,34.42 7.097,34.445 ; 7.072,34.47 7.097,34.445 ; 7.072,34.495 7.097,34.52 ; 7.072,34.545 7.097,34.52 ; 7.072,34.57 7.097,34.595 ; 7.072,34.62 7.097,34.595 ; 7.072,34.745 7.097,34.77 ; 7.072,35.47 4.247,35.47 ; 7.072,35.495 4.197,35.495 4.197,35.82 4.697,35.82 ; 7.072,35.52 4.197,35.52 4.172,35.545 4.172,35.795 4.897,35.795 ; 7.072,35.57 6.622,35.57 ; 7.072,35.62 6.622,35.62 ; 7.072,35.67 6.622,35.67 ; 7.072,35.77 6.622,35.77 ; 7.072,35.82 6.622,35.82 ; 7.072,35.87 6.622,35.87 ; 7.072,35.92 6.622,35.92 ; 7.072,35.97 6.622,35.97 ; 7.122,22.42 7.147,22.395 9.972,22.395 ; 7.122,22.82 7.172,22.87 ; 7.147,28.02 7.147,27.57 ; 7.172,27.57 7.197,27.545 ; 7.197,22.87 7.197,22.345 9.972,22.345 ; 7.197,28.02 7.197,27.545 ; 7.222,22.345 7.247,22.32 ; 7.247,22.87 7.247,22.32 ; 7.247,32.82 7.247,32.32 7.272,32.345 7.297,32.32 ; 7.297,22.87 7.297,22.32 ; 7.297,32.82 7.297,32.32 ; 7.322,27.545 7.347,27.52 ; 7.322,35.37 7.322,34.895 ; 7.347,27.995 7.347,27.52 ; 7.372,32.32 7.397,32.295 ; 7.397,32.795 7.397,32.295 ; 7.397,34.895 7.397,35.37 ; 7.422,34.895 7.447,34.87 ; 7.422,35.345 7.397,35.37 ; 7.447,35.345 7.447,34.87 ; 7.472,22.295 7.497,22.27 ; 7.497,27.52 7.522,27.495 ; 7.522,22.82 7.497,22.845 ; 7.522,34.87 7.522,35.345 ; 7.547,22.82 7.547,22.27 ; 7.547,27.945 7.522,27.97 ; 7.547,32.77 7.547,32.27 ; 7.547,35.32 7.522,35.345 ; 7.572,34.87 7.597,34.845 ; 7.597,32.27 7.597,32.77 ; 7.597,35.32 7.597,34.845 ; 7.622,22.27 7.647,22.245 ; 7.622,32.27 7.647,32.245 ; 7.622,32.745 7.597,32.77 ; 7.622,34.845 7.622,35.32 ; 7.647,27.495 7.672,27.47 ; 7.647,32.745 7.647,32.245 ; 7.672,22.795 7.647,22.82 ; 7.697,22.795 7.697,22.245 ; 7.697,27.92 7.672,27.945 ; 7.697,32.745 7.697,32.245 ; 7.722,22.245 7.747,22.22 ; 7.722,32.245 7.722,32.745 ; 7.747,22.795 7.747,22.22 ; 7.747,32.72 7.722,32.745 ; 7.747,35.295 7.747,34.82 ; 7.772,32.245 7.797,32.22 ; 7.797,32.72 7.797,32.22 ; 7.797,34.82 7.797,35.295 ; 7.822,35.27 7.797,35.295 ; 7.847,22.77 7.847,22.22 ; 7.847,32.72 7.847,32.22 ; 7.847,34.82 7.872,34.795 ; 7.872,35.27 7.872,34.795 ; 7.897,22.22 7.922,22.195 ; 7.922,27.445 7.947,27.42 ; 7.922,32.22 7.947,32.195 ; 7.922,34.795 7.922,35.27 ; 7.947,22.745 7.922,22.77 ; 7.947,32.695 7.947,32.195 ; 7.947,35.245 7.922,35.27 ; 7.972,22.745 7.972,22.195 ; 7.972,27.87 7.947,27.895 ; 7.997,27.87 7.997,27.42 ; 7.997,34.795 8.022,34.77 ; 8.022,32.195 8.022,32.695 ; 8.047,32.67 8.022,32.695 ; 8.072,27.42 8.097,27.395 ; 8.072,32.195 8.097,32.17 ; 8.072,34.77 8.072,35.245 ; 8.097,32.67 8.097,32.17 ; 8.097,35.22 8.072,35.245 ; 8.122,27.845 8.097,27.87 ; 8.122,34.77 8.147,34.745 ; 8.147,27.845 8.147,27.395 ; 8.147,35.22 8.147,34.745 ; 8.172,22.17 8.197,22.145 ; 8.172,27.395 8.172,27.845 ; 8.172,32.645 8.147,32.67 ; 8.197,34.745 8.197,35.22 ; 8.222,22.695 8.197,22.72 ; 8.222,32.17 8.247,32.145 ; 8.222,35.195 8.197,35.22 ; 8.247,22.695 8.247,22.145 ; 8.247,32.645 8.247,32.145 ; 8.272,34.745 8.297,34.72 ; 8.297,35.195 8.297,34.72 ; 8.322,22.145 8.347,22.12 ; 8.322,27.37 8.322,27.82 ; 8.322,34.72 8.322,35.195 ; 8.347,27.37 8.372,27.345 ; 8.347,35.17 8.322,35.195 ; 8.372,22.67 8.347,22.695 ; 8.372,32.145 8.397,32.12 ; 8.397,22.67 8.397,22.12 ; 8.397,27.795 8.372,27.82 ; 8.397,32.62 8.397,32.12 ; 8.397,34.72 8.422,34.695 ; 8.422,35.17 8.422,34.695 ; 8.472,27.345 8.472,27.795 ; 8.472,34.695 8.472,35.17 ; 8.497,27.345 8.522,27.32 ; 8.497,35.145 8.472,35.17 ; 8.547,22.645 8.547,22.095 ; 8.547,27.77 8.522,27.795 ; 8.547,32.12 8.572,32.095 ; 8.547,34.695 8.572,34.67 ; 8.572,35.145 8.572,34.67 ; 8.597,32.57 8.572,32.595 ; 8.622,34.67 8.622,35.145 ; 8.647,27.32 8.672,27.295 ; 8.647,35.12 8.622,35.145 ; 8.697,22.62 8.697,22.07 ; 8.697,27.745 8.672,27.77 ; 8.697,34.67 8.722,34.645 ; 8.722,32.07 8.722,32.57 ; 8.722,35.12 8.722,34.645 ; 8.747,32.545 8.722,32.57 ; 8.772,22.07 8.772,22.62 ; 8.772,34.645 8.772,35.12 ; 8.797,22.07 8.822,22.045 ; 8.797,22.595 8.772,22.62 ; 8.797,27.295 8.822,27.27 ; 8.797,34.645 8.822,34.62 ; 8.797,35.095 8.772,35.12 ; 8.822,22.595 8.822,22.045 ; 8.822,27.745 8.822,27.27 ; 8.822,32.07 8.847,32.045 ; 8.822,35.095 8.822,34.62 ; 8.847,27.27 8.847,27.745 ; 8.872,22.045 8.872,22.595 ; 8.872,27.72 8.847,27.745 ; 8.872,32.52 8.847,32.545 ; 8.922,22.045 8.922,22.595 ; 8.922,27.27 8.922,27.72 ; 8.922,34.62 8.922,35.095 ; 8.947,22.045 8.972,22.02 ; 8.947,22.57 8.922,22.595 ; 8.947,27.27 8.972,27.245 ; 8.947,35.07 8.922,35.095 ; 8.972,22.57 8.972,22.02 ; 8.972,34.62 8.997,34.595 ; 8.997,27.695 8.972,27.72 ; 8.997,35.07 8.997,34.595 ; 9.047,22.02 9.047,22.57 ; 9.047,34.595 9.047,35.07 ; 9.072,22.545 9.047,22.57 ; 9.072,32.02 9.072,32.495 ; 9.072,34.595 9.097,34.57 ; 9.072,35.045 9.047,35.07 ; 9.097,22.02 9.122,21.995 ; 9.097,35.045 9.097,34.57 ; 9.122,22.545 9.122,21.995 ; 9.122,27.22 9.122,27.695 ; 9.147,27.67 9.122,27.695 ; 9.147,35.045 9.147,34.57 ; 9.172,27.22 9.197,27.195 ; 9.172,34.57 9.172,35.045 ; 9.197,21.995 9.197,22.545 ; 9.197,27.67 9.197,27.195 ; 9.197,35.02 9.172,35.045 ; 9.222,22.52 9.197,22.545 ; 9.247,21.995 9.272,21.97 ; 9.247,27.67 9.247,27.195 ; 9.247,31.995 9.247,32.47 ; 9.247,34.57 9.272,34.545 ; 9.272,22.52 9.272,21.97 ; 9.272,27.195 9.272,27.67 ; 9.272,31.995 9.297,31.97 ; 9.272,32.445 9.247,32.47 ; 9.272,35.02 9.272,34.545 ; 9.297,27.645 9.272,27.67 ; 9.297,32.445 9.297,31.97 ; 9.322,21.97 9.322,22.52 ; 9.322,27.195 9.322,27.645 6.997,27.645 6.997,28.045 ; 9.322,34.545 9.322,35.02 ; 9.347,22.495 9.322,22.52 ; 9.347,27.595 9.322,27.62 7.047,27.62 7.022,27.645 7.022,28.045 ; 9.347,34.995 9.322,35.02 ; 9.372,27.195 9.372,27.595 ; 9.397,21.97 9.422,21.945 ; 9.397,27.195 9.397,27.57 7.147,27.57 ; 9.422,22.495 9.422,21.945 ; 9.422,31.92 9.372,31.97 9.372,32.445 ; 9.422,32.42 9.422,31.77 ; 9.447,29.045 9.697,29.045 ; 9.447,29.07 9.722,29.07 9.722,32.37 ; 9.447,29.095 9.747,29.095 9.747,32.345 9.722,32.37 ; 9.447,29.12 9.797,29.12 ; 9.447,29.145 9.847,29.145 9.847,32.195 ; 9.447,29.195 9.872,29.195 ; 9.447,29.795 9.872,29.795 ; 9.447,29.845 9.872,29.845 ; 9.447,29.895 9.872,29.895 ; 9.447,29.945 9.872,29.945 ; 9.447,29.995 9.872,29.995 ; 9.447,30.045 9.872,30.045 ; 9.447,32.42 9.447,31.345 9.872,31.345 ; 9.472,21.945 9.472,22.495 ; 9.472,32.42 9.472,31.32 ; 9.497,22.47 9.472,22.495 ; 9.497,30.92 9.497,28.995 9.522,28.995 ; 9.497,32.42 9.497,31.245 ; 9.522,21.945 9.547,21.92 ; 9.522,22.47 9.572,22.52 9.547,22.545 ; 9.547,30.995 9.572,30.97 ; 9.572,22.57 9.547,22.545 ; 9.572,23.62 9.997,23.62 ; 9.572,23.695 9.622,23.645 9.597,23.62 9.622,23.595 ; 9.572,23.795 9.597,23.82 ; 9.572,24.345 9.622,24.395 9.597,24.42 9.997,24.42 ; 9.572,24.47 9.997,24.47 ; 9.572,24.62 9.622,24.67 ; 9.572,24.695 9.622,24.745 9.597,24.77 ; 9.572,24.82 9.622,24.87 ; 9.572,32.395 9.572,31.195 9.872,31.195 ; 9.597,22.82 9.572,22.795 ; 9.597,22.87 9.997,22.87 ; 9.597,22.945 9.997,22.945 ; 9.597,23.02 9.997,23.02 ; 9.597,23.07 9.997,23.07 ; 9.597,23.22 9.997,23.22 ; 9.597,23.27 9.997,23.27 ; 9.597,23.32 9.997,23.32 ; 9.597,23.37 9.997,23.37 ; 9.597,23.42 9.997,23.42 ; 9.597,23.47 9.997,23.47 ; 9.597,23.52 9.997,23.52 ; 9.597,24.295 9.997,24.295 ; 9.597,24.37 9.997,24.37 ; 9.597,31.17 9.522,31.245 9.522,32.42 ; 9.597,32.395 9.597,31.145 9.872,31.145 ; 9.622,21.92 9.622,23.82 9.647,23.845 9.622,23.87 ; 9.622,23.695 9.597,23.67 9.997,23.67 ; 9.622,23.72 9.597,23.745 ; 9.622,23.77 9.597,23.745 ; 9.622,23.795 9.597,23.82 ; 9.622,24.32 9.572,24.27 9.597,24.245 9.997,24.245 ; 9.622,24.345 9.572,24.395 9.622,24.445 9.597,24.47 9.622,24.495 9.572,24.545 9.622,24.595 ; 9.622,24.62 9.597,24.645 9.997,24.645 ; 9.622,24.695 9.597,24.72 9.997,24.72 ; 9.622,24.795 9.597,24.77 ; 9.622,24.82 9.597,24.845 9.997,24.845 ; 9.622,31.02 9.522,30.92 9.522,28.995 ; 9.647,21.92 9.647,23.895 9.997,23.895 ; 9.647,31.07 9.622,31.045 ; 9.647,31.12 9.622,31.145 9.622,32.395 ; 9.672,21.92 9.672,23.92 9.997,23.92 ; 9.672,25.045 9.697,25.02 ; 9.697,21.92 9.697,23.945 ; 9.722,21.92 9.722,23.945 9.747,23.97 ; 9.722,24.095 9.697,24.12 9.697,25.02 ; 9.747,24.045 9.722,24.07 ; 9.822,32.245 7.697,32.245 ; 9.847,29.17 9.872,29.195 ; 9.872,30.82 9.447,30.82 ; 9.872,30.87 9.447,30.87 9.472,30.845 9.447,30.82 ; 9.872,30.92 9.472,30.92 9.497,30.895 9.472,30.87 9.472,29.045 ; 9.872,30.945 9.547,30.945 ; 9.872,30.97 9.572,30.97 ; 9.872,30.995 9.597,30.995 ; 9.872,31.045 9.622,31.045 ; 9.872,31.37 9.422,31.37 ; 9.872,31.42 9.422,31.42 ; 9.872,31.47 9.422,31.47 ; 9.872,31.52 9.422,31.52 ; 9.872,31.57 9.422,31.57 ; 9.872,31.62 9.422,31.62 ; 9.872,31.67 9.422,31.67 ; 9.872,31.72 9.422,31.72 ; 9.872,31.77 9.422,31.77 ; 9.872,31.945 9.397,31.945 9.397,32.42 9.372,32.445 ; 9.872,31.97 9.297,31.97 ; 9.872,31.995 9.147,31.995 ; 9.872,32.02 8.997,32.02 ; 9.872,32.045 8.847,32.045 ; 9.872,32.07 8.697,32.07 ; 9.972,22.17 8.097,22.17 ; 9.972,22.195 7.972,22.195 ; 9.972,22.22 7.847,22.22 ; 9.972,22.245 7.697,22.245 ; 9.972,22.27 7.547,22.27 ; 9.972,22.295 7.397,22.295 ; 9.972,22.32 7.297,22.32 ; 9.972,22.37 7.197,22.37 7.172,22.395 ; 9.972,22.42 7.097,22.42 7.097,22.82 ; 9.972,22.445 7.097,22.445 7.072,22.47 7.072,22.795 7.772,22.795 ; 9.972,22.47 7.047,22.47 ; 9.972,22.495 9.547,22.495 9.547,21.92 ; 9.972,22.545 9.547,22.545 ; 9.972,22.695 9.572,22.695 ; 9.972,22.745 9.572,22.745 ; 9.972,22.77 9.997,22.795 ; 9.972,22.82 9.997,22.795 ; 9.972,22.845 9.997,22.87 ; 9.972,22.895 9.997,22.87 ; 9.972,22.92 9.997,22.945 ; 9.972,22.97 9.997,22.945 ; 9.972,22.995 9.997,23.02 ; 9.972,25.12 9.797,25.12 ; 9.997,23.745 9.597,23.745 ; 9.997,23.82 9.597,23.82 ; 9.997,23.87 9.622,23.87 ; 9.997,23.945 9.697,23.945 ; 9.997,24.07 9.722,24.07 ; 9.997,24.12 9.672,24.12 ; 9.997,24.17 9.672,24.17 ; 9.997,24.195 9.622,24.195 9.647,24.22 9.622,24.245 9.647,24.27 9.622,24.295 9.622,24.92 ; 9.997,24.52 9.597,24.52 9.622,24.545 9.597,24.57 9.997,24.57 ; 9.997,24.77 9.597,24.77 ; 9.997,24.92 9.622,24.92 ; 9.997,24.945 9.647,24.945 ; 9.997,24.995 9.647,24.995 ; 9.997,25.02 9.697,25.02 ; 11.847,34.345 12.097,34.345 ; 11.847,34.37 11.997,34.37 ; 11.872,34.195 12.722,34.195 ; 11.872,34.22 12.622,34.22 ; 11.872,34.245 12.497,34.245 ; 11.872,34.27 12.397,34.27 ; 11.872,34.395 11.872,34.17 ; 11.872,37.845 11.847,37.87 ; 11.922,34.37 11.897,34.395 ; 11.922,37.695 12.172,37.695 ; 11.922,37.945 11.922,37.67 ; 11.947,37.62 12.422,37.62 ; 11.947,37.82 12.022,37.745 12.022,37.545 ; 11.947,37.845 11.997,37.895 ; 11.947,37.945 11.947,37.595 ; 11.972,34.12 11.997,34.095 ; 11.972,37.945 11.972,37.87 11.847,37.87 ; 12.022,34.345 11.997,34.37 ; 12.072,34.095 12.097,34.07 ; 12.097,37.52 12.122,37.495 ; 12.122,34.32 12.097,34.345 ; 12.147,37.495 12.172,37.47 ; 12.147,37.695 12.122,37.72 ; 12.147,37.895 12.172,37.87 ; 12.147,44.595 12.697,44.595 ; 12.147,44.62 12.447,44.62 ; 12.147,44.645 12.347,44.645 ; 12.147,44.695 12.147,44.57 ; 12.172,34.07 12.197,34.045 ; 12.172,37.945 12.172,37.87 ; 12.172,44.47 12.947,44.47 ; 12.172,44.495 12.872,44.495 ; 12.172,44.52 12.797,44.52 ; 12.172,44.695 12.172,44.445 ; 12.197,37.47 12.222,37.445 ; 12.197,37.67 12.172,37.695 ; 12.197,37.87 12.197,37.945 ; 12.222,34.295 12.197,34.32 ; 12.222,37.67 12.222,37.445 ; 12.222,37.92 12.197,37.945 ; 12.222,44.42 12.247,44.395 ; 12.222,44.67 12.197,44.695 ; 12.247,37.445 12.247,37.67 ; 12.247,37.87 12.272,37.845 ; 12.247,44.67 12.247,44.395 ; 12.272,34.045 12.297,34.02 ; 12.272,37.445 12.297,37.42 ; 12.272,37.645 12.247,37.67 ; 12.272,37.92 12.272,37.845 ; 12.272,44.395 12.272,44.67 ; 12.297,37.645 12.297,37.42 ; 12.297,37.845 12.297,37.92 ; 12.297,44.645 12.272,44.67 ; 12.322,34.27 12.297,34.295 ; 12.322,37.845 12.347,37.82 ; 12.322,37.895 12.297,37.92 ; 12.322,44.395 12.347,44.37 ; 12.347,37.895 12.347,37.82 ; 12.372,37.82 12.372,37.895 ; 12.372,44.62 12.347,44.645 ; 12.397,37.395 12.422,37.37 ; 12.397,37.82 12.422,37.795 ; 12.397,37.87 12.372,37.895 ; 12.397,44.37 12.422,44.345 ; 12.422,44.62 12.422,44.345 ; 12.447,37.595 12.422,37.62 ; 12.447,37.795 12.472,37.77 ; 12.447,37.845 12.422,37.87 ; 12.447,44.345 12.447,44.62 ; 12.472,37.37 12.497,37.345 ; 12.472,44.345 12.497,44.32 ; 12.472,44.595 12.447,44.62 ; 12.497,37.595 12.497,37.345 ; 12.497,37.77 12.522,37.745 ; 12.497,37.82 12.472,37.845 ; 12.522,33.72 12.622,33.72 ; 12.522,34.945 12.622,34.945 12.622,35.17 ; 12.522,34.97 12.647,34.97 12.647,35.17 ; 12.522,34.995 12.972,34.995 ; 12.522,36.12 12.972,36.12 ; 12.522,36.895 12.647,36.895 ; 12.522,36.92 12.972,36.92 ; 12.522,37.345 12.522,37.595 ; 12.522,38.67 13.272,38.67 13.322,38.62 13.322,38.52 ; 12.522,38.695 13.272,38.695 13.297,38.72 ; 12.522,39.895 12.822,39.895 ; 12.522,39.92 13.397,39.92 13.397,39.72 13.497,39.72 13.522,39.695 ; 12.522,39.945 13.372,39.945 13.372,39.745 13.497,39.745 ; 12.522,41.195 13.397,41.195 ; 12.522,41.22 13.297,41.22 ; 12.522,41.77 13.497,41.77 ; 12.522,41.795 13.222,41.795 ; 12.522,42.67 12.647,42.67 ; 12.522,42.695 12.972,42.695 ; 12.522,43.82 13.197,43.82 ; 12.522,43.845 13.122,43.845 ; 12.522,44.62 12.497,44.595 12.497,44.32 ; 12.522,44.72 12.697,44.72 12.697,44.17 ; 12.547,33.645 12.697,33.645 ; 12.547,34.82 12.622,34.82 12.622,34.695 13.522,34.695 ; 12.547,34.87 12.522,34.895 ; 12.547,35.07 12.922,35.07 12.922,34.92 12.947,34.895 13.022,34.895 ; 12.547,35.62 12.897,35.62 ; 12.547,35.645 12.822,35.645 ; 12.547,35.67 12.747,35.67 ; 12.547,35.72 12.547,35.595 ; 12.547,36.795 12.522,36.82 ; 12.547,36.995 12.922,36.995 12.922,36.845 12.997,36.845 13.022,36.82 ; 12.547,37.345 12.572,37.32 ; 12.547,37.57 12.522,37.595 ; 12.547,37.745 12.597,37.695 ; 12.547,37.795 12.522,37.82 ; 12.547,38.445 12.622,38.445 12.622,38.27 ; 12.547,39.495 13.172,39.495 ; 12.547,39.52 13.072,39.52 ; 12.547,39.545 12.972,39.545 ; 12.547,39.57 12.872,39.57 ; 12.547,39.62 12.547,39.47 ; 12.547,40.02 13.297,40.02 13.297,39.795 ; 12.547,40.695 13.047,40.695 ; 12.547,40.72 12.997,40.72 ; 12.547,40.745 12.797,40.745 ; 12.547,40.77 12.722,40.77 ; 12.547,40.82 12.547,40.67 ; 12.547,41.695 13.522,41.695 ; 12.547,42.57 12.522,42.595 ; 12.547,42.77 12.922,42.77 12.922,42.62 12.997,42.62 13.022,42.595 ; 12.547,43.32 13.022,43.32 13.022,43.02 ; 12.547,43.345 12.822,43.345 ; 12.547,43.37 12.747,43.37 ; 12.547,44.245 13.472,44.245 13.472,44.52 ; 12.547,44.27 13.497,44.27 ; 12.547,44.745 12.547,44.195 12.722,44.195 ; 12.572,33.97 12.597,33.945 ; 12.572,35.47 13.522,35.47 ; 12.572,35.495 13.522,35.495 ; 12.572,35.52 13.522,35.52 ; 12.572,35.545 13.522,35.545 ; 12.572,35.72 12.572,35.445 13.497,35.445 13.522,35.47 ; 12.572,37.57 12.572,37.32 ; 12.572,38.645 12.597,38.67 ; 12.572,39.42 13.547,39.42 ; 12.572,39.62 12.572,39.395 ; 12.572,39.77 12.547,39.795 ; 12.572,40.595 13.472,40.595 ; 12.572,40.62 13.472,40.62 ; 12.572,43.22 13.472,43.22 ; 12.572,43.245 13.472,43.245 13.472,43.02 13.447,42.995 ; 12.572,44.195 12.572,44.745 ; 12.597,33.745 12.622,33.72 ; 12.597,33.82 12.622,33.845 ; 12.597,34.22 12.597,33.52 ; 12.597,34.845 12.722,34.72 12.722,34.595 ; 12.597,34.895 12.522,34.895 ; 12.597,34.92 12.672,34.995 ; 12.597,35.445 12.597,35.72 ; 12.597,36.195 12.597,35.995 13.272,35.995 ; 12.597,36.77 12.697,36.67 12.697,36.545 13.497,36.545 ; 12.597,36.82 12.522,36.82 ; 12.597,36.87 12.622,36.895 12.622,37.095 ; 12.597,38.47 12.697,38.37 12.697,38.195 13.497,38.195 13.522,38.22 ; 12.597,40.795 12.572,40.82 ; 12.597,42.545 12.697,42.445 12.697,42.32 13.497,42.32 ; 12.597,42.595 12.522,42.595 ; 12.597,42.645 12.622,42.67 12.622,42.87 ; 12.597,44.195 12.597,44.745 ; 12.622,35.445 12.647,35.42 ; 12.622,35.695 12.597,35.72 ; 12.622,36.195 12.622,35.97 13.247,35.97 ; 12.622,38.82 12.622,38.645 13.297,38.645 13.297,38.57 13.322,38.545 13.422,38.545 ; 12.622,39.37 12.647,39.345 ; 12.622,39.595 12.597,39.62 ; 12.622,40.57 12.647,40.545 ; 12.622,41.02 12.572,41.07 ; 12.622,43.17 12.647,43.145 ; 12.622,44.195 12.622,44.72 12.597,44.745 ; 12.647,33.895 12.622,33.87 12.547,33.87 12.547,33.62 ; 12.647,34.195 12.622,34.22 ; 12.647,35.695 12.647,35.42 ; 12.647,36.195 12.647,35.945 ; 12.647,38.82 12.647,38.62 13.347,38.62 ; 12.647,39.595 12.647,39.345 ; 12.647,43.97 12.647,43.595 12.722,43.595 12.972,43.345 ; 12.647,44.72 12.647,44.195 12.672,44.17 ; 12.672,34.195 12.672,33.895 ; 12.672,35.42 12.672,35.695 ; 12.672,35.945 12.697,35.92 ; 12.672,38.82 12.672,38.595 13.197,38.595 13.197,38.695 ; 12.672,39.595 12.697,39.62 ; 12.672,40.145 12.672,39.645 12.747,39.645 12.747,39.295 ; 12.672,40.545 12.697,40.52 ; 12.672,40.77 12.647,40.795 ; 12.672,41.345 12.672,40.945 12.747,40.945 12.972,40.72 12.972,40.42 ; 12.672,41.92 12.672,41.52 12.747,41.52 12.747,41.445 12.822,41.445 12.822,41.045 ; 12.672,43.145 12.697,43.12 ; 12.672,43.37 12.647,43.395 ; 12.672,43.97 12.672,43.57 12.747,43.57 12.747,43.495 12.822,43.495 12.822,43.42 12.897,43.42 12.897,43.07 12.922,43.045 ; 12.672,44.72 12.672,44.17 ; 12.697,33.92 12.672,33.895 ; 12.697,35.42 12.722,35.395 ; 12.697,35.67 12.672,35.695 ; 12.697,36.195 12.697,35.92 ; 12.697,38.82 12.697,38.57 ; 12.697,39.745 12.572,39.745 ; 12.697,39.795 12.547,39.795 ; 12.697,39.82 12.772,39.895 ; 12.697,40.77 12.697,40.52 ; 12.697,41.345 12.697,40.92 12.772,40.92 12.772,40.845 12.847,40.845 12.847,40.77 12.922,40.77 12.922,40.445 ; 12.697,41.92 12.697,41.495 12.772,41.495 12.772,41.42 12.847,41.42 12.847,41.045 ; 12.697,43.37 12.697,43.12 ; 12.697,43.97 12.697,43.545 12.772,43.545 12.772,43.47 12.847,43.47 12.847,43.395 12.922,43.395 12.922,43.045 ; 12.722,33.92 12.722,34.195 ; 12.722,35.67 12.722,35.395 ; 12.722,35.92 12.747,35.895 ; 12.722,37.295 12.747,37.27 ; 12.722,38.57 12.747,38.545 ; 12.722,41.02 12.772,41.07 ; 12.722,41.345 12.722,40.895 12.797,40.895 12.797,40.82 12.872,40.82 12.872,40.47 12.897,40.445 ; 12.722,41.57 12.622,41.57 12.622,41.895 12.647,41.92 ; 12.722,41.92 12.722,41.47 12.797,41.47 12.797,41.395 12.872,41.395 12.872,41.045 ; 12.722,43.62 12.622,43.62 12.622,43.97 ; 12.722,44.22 12.747,44.245 ; 12.747,34.17 12.722,34.195 ; 12.747,35.395 12.747,35.67 ; 12.747,36.92 12.747,37.12 ; 12.747,38.82 12.747,38.545 ; 12.747,40.17 12.747,39.87 12.522,39.87 ; 12.747,41.92 12.747,41.62 12.597,41.62 12.547,41.67 ; 12.747,42.695 12.747,42.895 ; 12.747,43.67 12.722,43.645 12.597,43.645 ; 12.747,43.945 12.722,43.97 ; 12.747,44.52 12.697,44.57 12.147,44.57 ; 12.772,34.995 12.797,34.97 ; 12.772,35.395 12.797,35.37 ; 12.772,35.645 12.747,35.67 ; 12.772,36.17 12.747,36.195 ; 12.772,37.095 12.747,37.12 ; 12.772,38.545 12.797,38.52 ; 12.772,39.295 12.797,39.27 ; 12.772,39.62 12.722,39.67 12.647,39.67 12.647,40.145 ; 12.772,41.32 12.747,41.345 ; 12.772,42.87 12.747,42.895 ; 12.797,34.695 12.797,34.545 ; 12.797,35.645 12.797,35.37 ; 12.797,35.895 12.822,35.87 ; 12.797,36.92 12.822,36.895 ; 12.797,37.27 12.797,37.645 ; 12.797,41.07 12.822,41.045 ; 12.797,41.32 12.822,41.345 12.922,41.345 12.922,41.045 ; 12.797,41.645 12.822,41.62 ; 12.797,41.895 12.772,41.92 ; 12.797,42.695 12.822,42.67 ; 12.797,43.095 12.822,43.07 ; 12.797,44.245 12.797,44.52 ; 12.822,33.32 12.847,33.295 ; 12.822,33.545 12.772,33.595 ; 12.822,34.545 12.847,34.52 ; 12.822,35.145 12.797,35.17 ; 12.822,35.37 12.822,35.645 ; 12.822,36.17 12.822,35.87 ; 12.822,36.445 12.847,36.42 ; 12.822,38.795 12.797,38.82 ; 12.822,40.17 12.822,39.895 ; 12.822,41.895 12.822,41.62 ; 12.822,42.22 12.847,42.195 ; 12.822,43.67 12.822,43.945 ; 12.822,44.245 12.847,44.22 ; 12.822,44.495 12.797,44.52 ; 12.847,33.545 12.847,33.295 ; 12.847,33.92 12.847,34.17 ; 12.847,34.695 12.847,34.52 ; 12.847,35.37 12.872,35.345 ; 12.847,35.62 12.822,35.645 ; 12.847,35.87 12.847,36.17 ; 12.847,39.92 12.822,39.895 ; 12.847,40.72 12.872,40.745 ; 12.847,43.32 12.822,43.345 ; 12.847,43.67 12.872,43.645 ; 12.847,43.92 12.822,43.945 ; 12.847,44.495 12.847,44.22 ; 12.872,33.92 12.897,33.895 ; 12.872,34.145 12.847,34.17 ; 12.872,34.52 12.897,34.495 ; 12.872,35.62 12.872,35.345 ; 12.872,36.145 12.847,36.17 ; 12.872,36.42 12.897,36.395 ; 12.872,36.595 12.847,36.62 ; 12.872,37.245 12.872,37.57 12.772,37.57 ; 12.872,38.07 12.897,38.045 ; 12.872,41.62 12.872,41.895 ; 12.872,42.195 12.897,42.17 ; 12.872,42.37 12.847,42.395 ; 12.872,43.32 12.897,43.345 ; 12.872,43.92 12.872,43.645 ; 12.872,44.22 12.872,44.495 ; 12.897,34.145 12.897,33.895 ; 12.897,34.695 12.897,34.495 ; 12.897,35.345 12.897,35.62 ; 12.897,36.595 12.897,36.395 ; 12.897,37.245 12.897,37.545 12.797,37.545 ; 12.897,38.295 12.897,38.045 ; 12.897,39.22 12.947,39.17 ; 12.897,39.545 12.872,39.57 ; 12.897,41.045 12.897,41.37 12.822,41.37 12.597,41.595 ; 12.897,41.62 12.922,41.595 ; 12.897,41.87 12.872,41.895 ; 12.897,42.37 12.897,42.17 ; 12.897,43.645 12.897,43.92 ; 12.897,44.22 12.922,44.195 ; 12.897,44.47 12.872,44.495 ; 12.922,34.495 12.947,34.47 ; 12.922,35.345 12.947,35.32 ; 12.922,35.595 12.897,35.62 ; 12.922,35.87 12.922,36.145 ; 12.922,37.245 12.922,37.52 12.072,37.52 ; 12.922,38.52 12.922,38.795 ; 12.922,39.545 12.922,39.195 13.047,39.195 13.047,39.095 ; 12.922,41.87 12.922,41.595 ; 12.922,43.645 12.947,43.62 ; 12.922,43.895 12.897,43.92 ; 12.922,44.47 12.922,44.195 ; 12.947,34.695 12.947,34.47 ; 12.947,35.595 12.947,35.32 ; 12.947,36.12 12.922,36.145 ; 12.947,36.395 12.972,36.37 ; 12.947,37.495 12.797,37.645 ; 12.947,38.77 12.922,38.795 ; 12.947,39.545 12.947,39.17 ; 12.947,42.17 12.972,42.145 ; 12.947,43.045 12.947,43.37 12.872,43.37 12.872,43.445 12.797,43.445 12.797,43.52 12.722,43.52 12.722,43.97 ; 12.947,43.895 12.947,43.62 ; 12.947,44.195 12.947,44.47 ; 12.972,33.245 12.997,33.22 ; 12.972,35.32 12.972,35.595 ; 12.972,35.87 12.972,36.12 ; 12.972,36.595 12.972,36.37 ; 12.972,36.795 12.897,36.87 12.897,37.02 12.547,37.02 ; 12.972,37.245 12.997,37.22 ; 12.972,42.37 12.972,42.145 ; 12.972,42.57 12.897,42.645 12.897,42.795 12.547,42.795 ; 12.972,43.045 12.997,43.02 ; 12.972,43.62 12.972,43.895 ; 12.972,44.445 12.947,44.47 ; 12.997,34.47 13.022,34.445 ; 12.997,34.82 12.947,34.87 ; 12.997,35.57 12.972,35.595 ; 12.997,36.095 12.972,36.12 ; 12.997,36.745 12.972,36.77 ; 12.997,37.495 12.997,37.22 ; 12.997,40.42 12.997,40.72 ; 12.997,41.02 12.997,41.295 ; 12.997,42.52 12.972,42.545 ; 12.997,43.62 13.022,43.595 ; 12.997,43.87 12.972,43.895 ; 12.997,44.195 13.022,44.17 ; 13.022,33.47 12.997,33.495 ; 13.022,33.87 13.047,33.845 ; 13.022,35.32 13.047,35.295 ; 13.022,35.87 13.022,36.095 ; 13.022,36.595 13.047,36.62 13.097,36.62 13.097,36.345 ; 13.022,36.795 13.047,36.77 ; 13.022,38.02 13.047,37.995 ; 13.022,38.52 13.022,38.77 ; 13.022,40.695 12.997,40.72 ; 13.022,41.27 12.997,41.295 ; 13.022,42.37 13.047,42.395 13.097,42.395 13.097,42.12 ; 13.022,42.57 13.047,42.545 ; 13.022,43.87 13.022,43.595 ; 13.022,44.445 13.022,44.17 ; 13.047,33.22 13.072,33.195 ; 13.047,34.12 13.047,33.845 ; 13.047,34.445 13.047,34.845 ; 13.047,35.57 13.047,35.295 ; 13.047,36.07 13.022,36.095 ; 13.047,36.645 13.022,36.67